# EAGLE board Thinkercad_model (EAGLE 9.7.0)

Size 212.93 x 232.27 mm. Coordinates in mm from the lower left corner, seen from the top.
Outline: 0,0 212.93,0 212.93,232.27 0,232.27 0,0
Copper layers (1*16): Top 0.035mm / dielectric 1.5mm / Bottom 0.035mm
Design rules "default": minimum track width 6mil, minimum drill 0.35mm, track to track 6mil, track to pad 6mil, pad to pad 6mil, via to via 6mil, smd to smd 6mil, copper to edge 40mil, drill to drill 6mil, minimum pad ring 10mil, minimum via ring 8mil, stop-mask expansion 4mil, vias tented up to drill 0mil, thermal gap 10mil

## Footprints (pad centres in the part's own frame; a part is rotated, then mirrored left to right if it is on the bottom)
MQ-XX-SOCKET = drill 1.27: 1 -6.223,6.223; 2 -8.788,0; 3 -6.223,-6.223; 4 6.223,-6.223; 5 8.788,0; 6 6.223,6.223
SENRD254W50D503H320B = drill 0.7 pad 1.3: 1 -1.27,0; 2 1.27,0
RESAD1016W63L850D250B = drill 0.83 pad 1.43: 1 -5.08,0; 2 5.08,0
SEN-13322 = drill 1.016 long: 1 -2.54,0; 2 0,0; 3 2.54,0
TO92 = drill 0.813 octagon: 1 -1.27,0; 2 0,1.905; 3 1.27,0
LCD-I2C = drill 1.016 long: 1 -19.05,-5.08; 2 -19.05,-7.62; 3 -19.05,-10.16; 4 -19.05,-12.7
ARDUINO-UNO-R3-SHIELD = drill 1.016 pad 1.88: 3.3V 24.13,-2.54; 5V 24.13,0; A0 24.13,12.7; A1 24.13,15.24; A2 24.13,17.78; A3 24.13,20.32; A4 24.13,22.86; A5 24.13,25.4; AREF -24.13,-13.97; D2 -24.13,20.32; D3 -24.13,17.78; D4 -24.13,15.24; D5 -24.13,12.7; D6 -24.13,10.16; D7 -24.13,7.62; D8 -24.13,3.81; D9 -24.13,1.27; D10 -24.13,-1.27; D11 -24.13,-3.81; D12 -24.13,-6.35; D13 -24.13,-8.89; GND@0 24.13,2.54; GND@1 24.13,5.08; GND@2 -24.13,-11.43; IOREF 24.13,-7.62; NC 24.13,-10.16; RES 24.13,-5.08; RX -24.13,25.4; SCL -24.13,-19.05; SDA -24.13,-16.51; TX -24.13,22.86; VIN 24.13,7.62

## Placement (x,y rotation side)
GAS2  GAS-SENSORMQ-XX-SOCKET  [MQ-XX-SOCKET]  155.34,12.92 270 top
GAS3  GAS-SENSORMQ-XX-SOCKET  [MQ-XX-SOCKET]  155.34,12.92 270 top
Q1  PHOTOTRANSISTOR  [SENRD254W50D503H320B]  177.47,193.97 180 top
R3  4k  [RESAD1016W63L850D250B]  150.26,31.97 90 top
R4  4k  [RESAD1016W63L850D250B]  150.26,31.97 90 top
SEN1  SEN-13322  [SEN-13322]  205.95,110.72 0 top
U3  TMP36GT9Z_TO92  [TO92]  130.55,189.67 0 top
U5  LCD-16X2-I2CSUNFOUNDER-IIC  [LCD-I2C]  30.73,224.72 0 top
UКОРАБЛЬ  ARDUINO-UNO-R3-SHIELD  [ARDUINO-UNO-R3-SHIELD]  134.82,153.29 270 top

## Library data of the parts
GAS2 GAS3 Q1 R3 R4 SEN1 U3 U5 UКОРАБЛЬ = Tinkercad

## Nets
UКОРАБЛЬ_3.3V: U3.3 UКОРАБЛЬ.3.3V
UКОРАБЛЬ_5V: GAS2.4 GAS2.5 GAS2.6 GAS3.4 GAS3.5 GAS3.6 Q1.1 SEN1.1 U5.2 UКОРАБЛЬ.5V
UКОРАБЛЬ_A0: U3.2 UКОРАБЛЬ.A0
UКОРАБЛЬ_A3: GAS2.1 GAS2.3 GAS3.1 GAS3.3 R3.1 R4.1 UКОРАБЛЬ.A3
UКОРАБЛЬ_A4: SEN1.3 UКОРАБЛЬ.A4
UКОРАБЛЬ_D2: Q1.2 UКОРАБЛЬ.D2
UКОРАБЛЬ_GND: GAS2.2 GAS3.2 R3.2 R4.2 SEN1.2 U3.1 U5.1 UКОРАБЛЬ.GND@0 UКОРАБЛЬ.GND@1 UКОРАБЛЬ.GND@2
UКОРАБЛЬ_SCL: U5.4 UКОРАБЛЬ.SCL
UКОРАБЛЬ_SDA: U5.3 UКОРАБЛЬ.SDA

## Tracks (layer width: path | path; a pad name or v marks a point on that pad's centre or on a via)
UКОРАБЛЬ_3.3V  (1 unrouted)
UКОРАБЛЬ_5V  (9 unrouted)
UКОРАБЛЬ_A0  (1 unrouted)
UКОРАБЛЬ_A3  (6 unrouted)
UКОРАБЛЬ_A4  (1 unrouted)
UКОРАБЛЬ_D2  (1 unrouted)
UКОРАБЛЬ_GND  (9 unrouted)
UКОРАБЛЬ_SCL  (1 unrouted)
UКОРАБЛЬ_SDA  (1 unrouted)